# Altium PCB PCB1.PcbDoc
Units mil, origin at the board's own origin, x right, y up, seen from the top; angles counter-clockwise.
Board outline 4590 x 4355 mil, 2 copper layers (Top Layer, Bottom Layer); 103 components, 89 nets, 465 pads, 47 vias.
Unrouted connection lines stored in the file: 37.
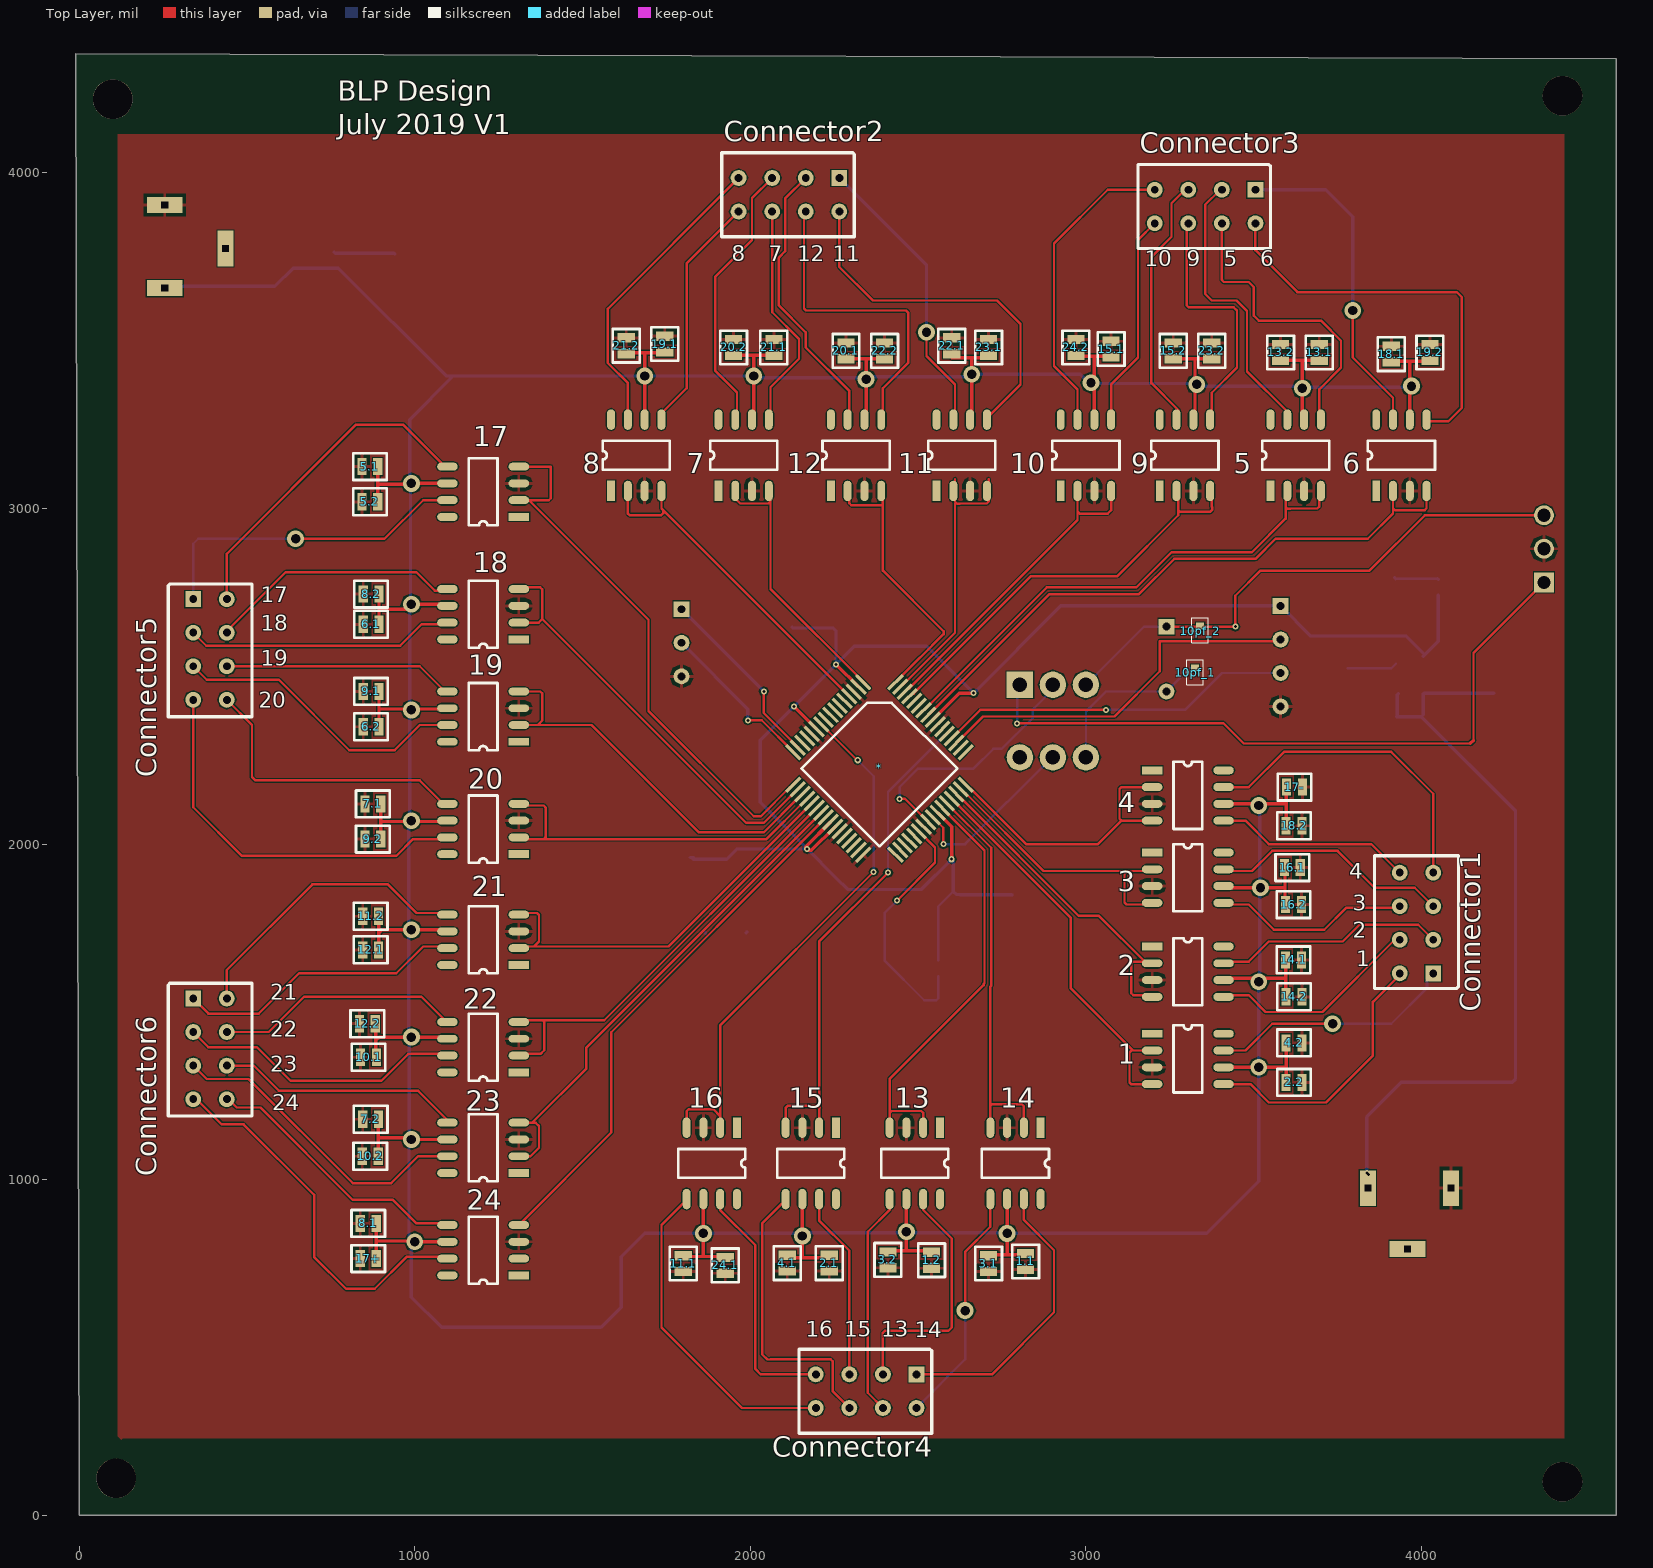
[diagram p0: Top Layer view]
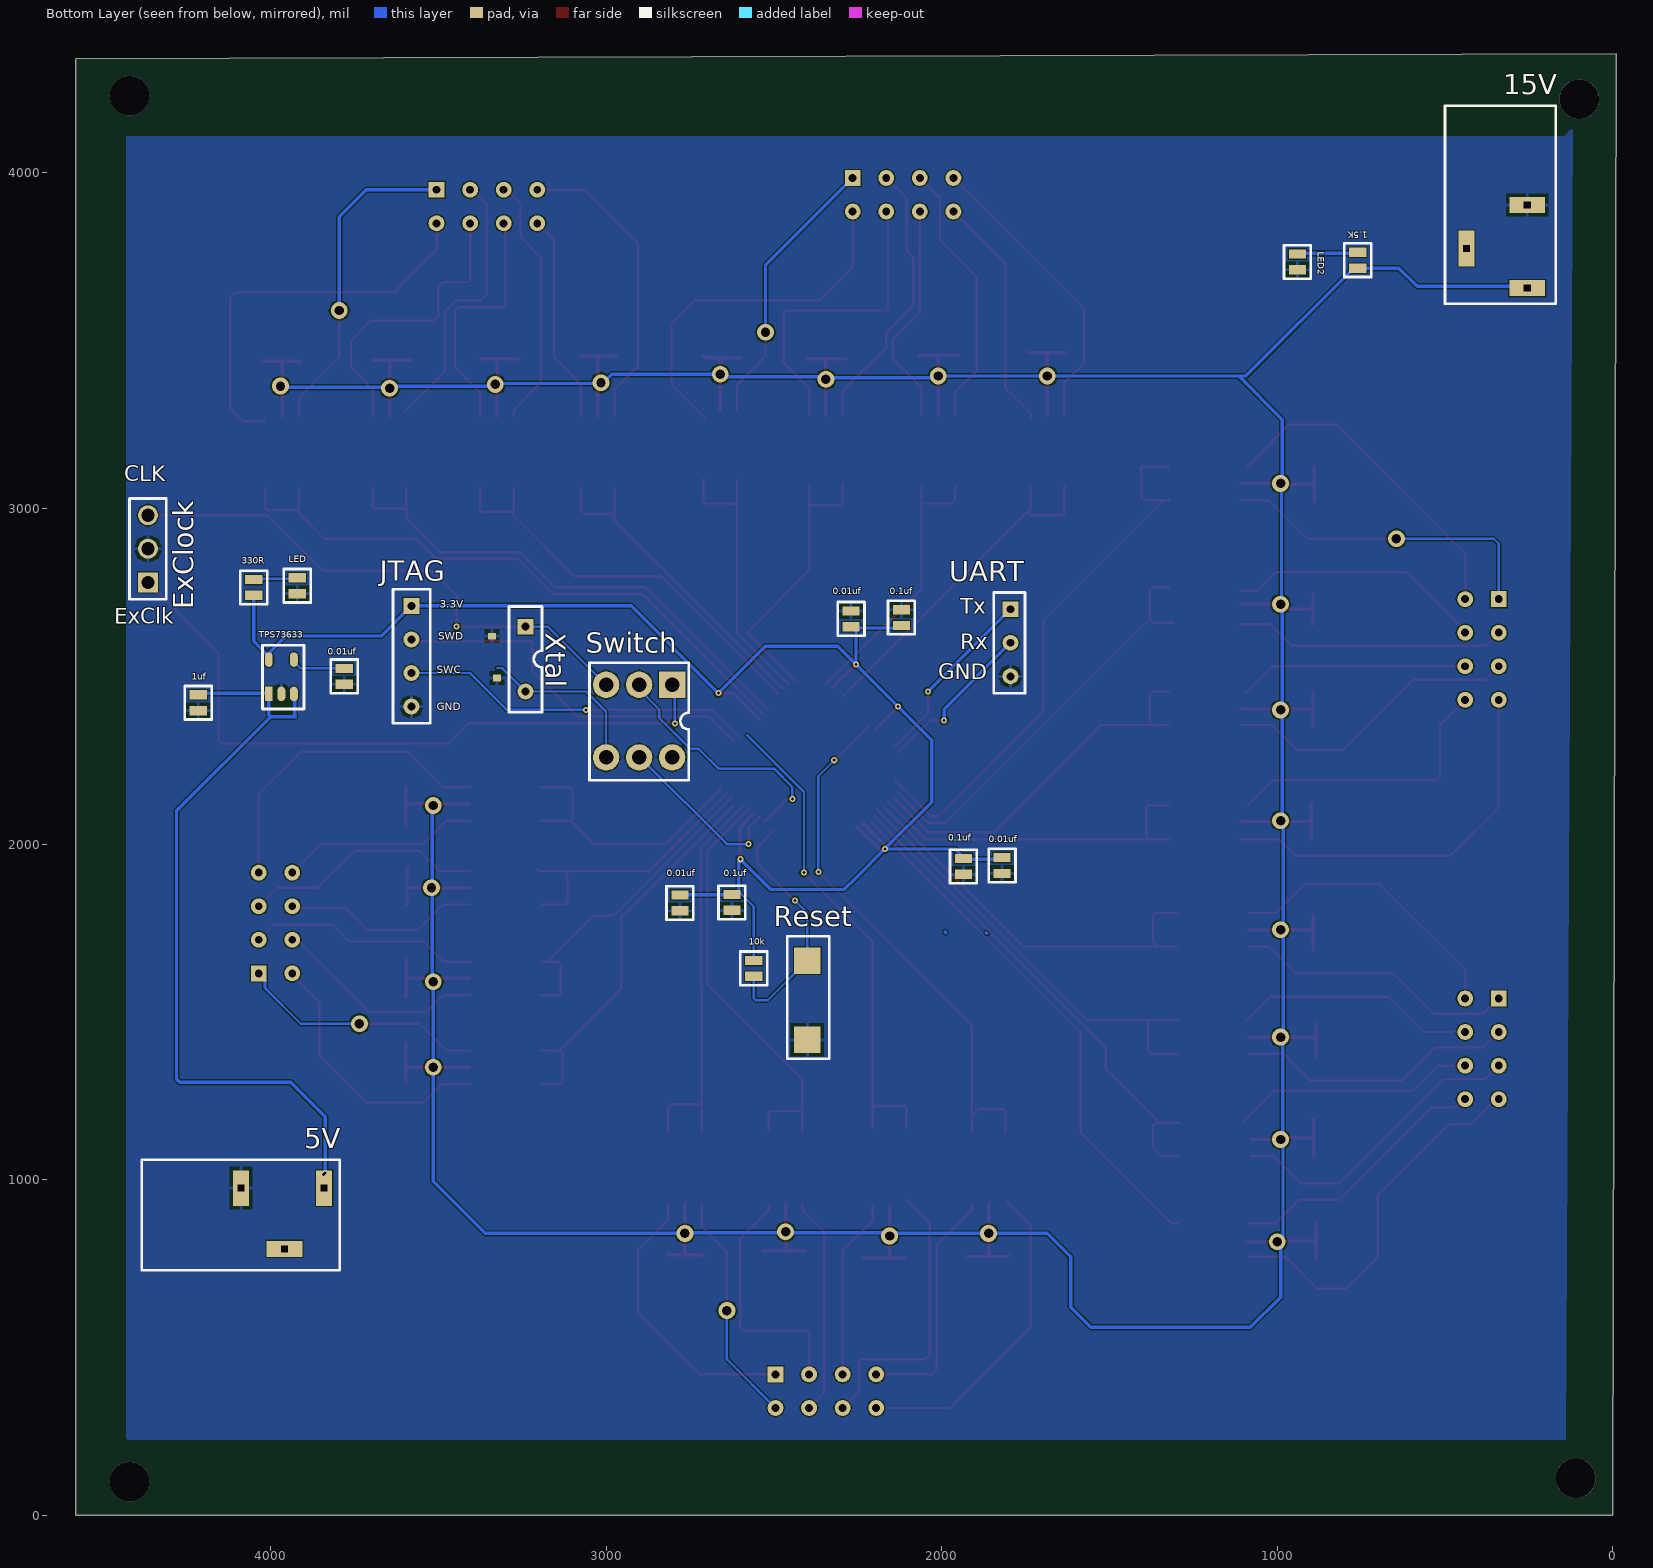
[diagram p1: Bottom Layer view, seen from below]

## Layer stack, top to bottom
Top Solder: solder mask 0.4, Solder Resist, Dk 3.5
Top Layer: signal copper 1.4
Dielectric 1: dielectric 12.6, FR-4, Dk 4.8
Bottom Layer: signal copper 1.4
Bottom Solder: solder mask 0.4, Solder Resist, Dk 3.5

## Board outline
-10,4355 0,50 0,0 30,0 4580,0 4580,30 4580,4340

## Design rules (kind name [scope] priority, off if disabled: settings)
Clearance [All] p1: gap=2 ignorepadtopadclearanceinfootprint=FALSE except(0: Arc-Hole Track-Hole SMDPad-Hole THPad-Hole Via-Hole Fill-Hole Poly-Hole Region-Hole Text-Hole; 3: Arc-Poly Track-Poly SMDPad-Poly THPad-Poly Fill-Poly Poly-Poly; 5: Via-Poly)
ComponentClearance [All] p1 off: gap=10 collisioncheckmode=3 verticalgap=10 showdistances=FALSE
PolygonConnect [All] p1: connectstyle=Relief reliefconductorwidth=10 reliefentries=4 polygonreliefangle="90 Angle" airgapwidth=10
RoutingVias [All] p1: holewidth=28 width=50 viastyle="Through Hole" minholewidth=28 minwidth=50 maxholewidth=28 maxwidth=50
ShortCircuit [All] p1 off: allowed=FALSE
SolderMaskExpansion [All] p1: expansion=4
Width [All] p1 off: maxlimit=10 minlimit=5 preferedwidth=10 bottomlayer_minwidth=10 minimp=50.000000 maximp=50.000000 favimp=50.000000
28 further rules are at their usual default settings.

## Components (designator, comment, footprint, x,y, rotation, side; value= is the part's Value field where it differs from the comment)
0.01uf "Capacitor" 0805 3780,2500 r270 bottom
0.1uf "Capacitor" 0805 1935,1933.62 r270 bottom (schematic designator 0.1uf_3)
0.01uf "Capacitor" 0805 1820,1936.38 r270 bottom (schematic designator 0.01uf_3)
0.1uf "Capacitor" 0805 2120,2675 r90 bottom (schematic designator 0.1uf_2)
0.01uf "Capacitor" 0805 2270,2671.38 r90 bottom (schematic designator 0.01uf_2)
0.1uf "Capacitor" 0805 2625,1826.38 r270 bottom (schematic designator 0.1uf_1)
0.01uf "Capacitor" 0805 2780,1825 r270 bottom (schematic designator 0.01uf_1)
1 "TC4428" TC4428SOC 3197.4,1435 r0 top
1.1 "Capacitor" 0805 2820,756.38 r270 top
1.2 "Capacitor" 0805 2540,760 r270 top
1.5K "Resistor" 0805 760,3740 r270 bottom
1uf "Capacitor" 0805 4215,2421.38 r90 bottom
2 "TC4428" TC4428SOC 3197.4,1695 r0 top
2.1 "Capacitor" 0805 2235,751.38 r270 top
2.2 "Capacitor" 0805 3620,1290 r0 top
3 "TC4428" TC4428SOC 3197.4,1975 r0 top
3.1 "Capacitor" 0805 2710,750 r270 top
3.2 "Capacitor" 0805 2410,761.38 r270 top
4 "TC4428" TC4428SOC 3197.4,2220 r0 top
4.1 "Capacitor" 0805 2110,751.38 r270 top
4.2 "Capacitor" 0805 3620,1407.76 r0 top
5 "TC4428" TC4428SOC 3550,3052.4 r90 top
5.1 "Capacitor" 0805 866.38,3125 r180 top
5.2 "Capacitor" 0805 866.38,3020 r180 top
5V "3.3VPower" DIP10 4383.31,975 r180 bottom
6 "TC4428" TC4428SOC 3865,3052.4 r90 top
6.1 "Capacitor" 0805 870,2655 r180 top
6.2 "Capacitor" 0805 870,2350 r180 top
7 "TC4428" TC4428SOC 1905,3052.4 r90 top
7.1 "Capacitor" 0805 875,2120 r180 top
7.2 "Capacitor" 0805 868.62,1180 r180 top
8 "TC4428" TC4428SOC 1585,3052.4 r90 top
8.1 "Capacitor" 0805 861.38,870 r180 top
8.2 "Capacitor" 0805 870,2745 r180 top
9 "TC4428" TC4428SOC 3220,3052.4 r90 top
9.1 "Capacitor" 0805 870,2455 r180 top
9.2 "Capacitor" 0805 875,2015 r180 top
10 "TC4428" TC4428SOC 2925,3052.4 r90 top
10.1 "Capacitor" 0805 862.24,1365 r180 top
10.2 "Capacitor" 0805 867.24,1070 r180 top
10k "Resistor" 0805 2560,1630 r90 bottom
10pf_1 "10pf" 10pf 3325,2510 r270 top
10pf_2 "10pf" 10pf 3340,2635 r270 top
11 "TC4428" TC4428SOC 2555,3052.4 r90 top
11.1 "Capacitor" 0805 1800,750 r270 top
11.2 "Capacitor" 0805 868.62,1785 r180 top
12 "TC4428" TC4428SOC 2240,3052.4 r90 top
12.1 "Capacitor" 0805 868.62,1685 r180 top
12.2 "Capacitor" 0805 858.62,1465 r180 top
13 "TC4428" TC4428SOC 2565,1155 r270 top
13.1 "Capacitor" 0805 3695,3465 r90 top
13.2 "Capacitor" 0805 3580,3465 r90 top
14 "TC4428" TC4428SOC 2865,1155 r270 top
14.1 "Capacitor" 0805 3618.62,1655 r0 top
14.2 "Capacitor" 0805 3620,1545 r0 top
15 "TC4428" TC4428SOC 2255,1155 r270 top
15.1 "Capacitor" 0805 3075,3475 r90 top
15.2 "Capacitor" 0805 3260,3470 r90 top
15V "12VPower" DIP10 255,4200 r270 bottom
16 "TC4428" TC4428SOC 1960,1155 r270 top
16.1 "Capacitor" 0805 3615,1930 r0 top
16.2 "Capacitor" 0805 3618.62,1820 r0 top
17 "TC4428" TC4428SOC 1310,2975 r180 top
17+ "Capacitor" 0805 861.38,765 r180 top
17- "Capacitor" 0805 3621.38,2170 r0 top
18 "TC4428" TC4428SOC 1310,2610 r180 top
18.1 "Capacitor" 0805 3910,3460 r90 top
18.2 "Capacitor" 0805 3620,2055 r0 top
19 "TC4428" TC4428SOC 1310,2305 r180 top
19.1 "Capacitor" 0805 1745,3490 r90 top
19.2 "Capacitor" 0805 4025,3465 r90 top
20 "TC4428" TC4428SOC 1310,1970 r180 top
20.1 "Capacitor" 0805 2285,3470 r90 top
20.2 "Capacitor" 0805 1950,3480 r90 top
21 "TC4428" TC4428SOC 1310,1640 r180 top
21.1 "Capacitor" 0805 2070,3480 r90 top
21.2 "Capacitor" 0805 1630,3485 r90 top
22 "TC4428" TC4428SOC 1310,1320 r180 top
22.1 "Capacitor" 0805 2600,3485 r90 top
22.2 "Capacitor" 0805 2400,3470 r90 top
23 "TC4428" TC4428SOC 1310,1020 r180 top
23.1 "Capacitor" 0805 2710,3480 r90 top
23.2 "Capacitor" 0805 3375,3470 r90 top
24 "TC4428" TC4428SOC 1310,715 r180 top
24.1 "Capacitor" 0805 1925,745 r270 top
24.2 "Capacitor" 0805 2970,3480 r90 top
330R "Resistor" 0805 4050,2765 r90 bottom
* "TM4C123GH6PM" "Quad64 - duplicate" 2336.24,2482.44 r315 top
Connector1 "Connector" Connector 4035,1615 r180 top
Connector2 "Connector" Connector 2265,3985 r270 top
Connector3 "Connector" Connector 3505,3950 r270 top
Connector4 "Connector" Connector 2495,420 r270 top
Connector5 "Connector" Connector 340,2730 r0 top
Connector6 "Connector" Connector 340,1540 r0 top
ExClock "3pin" 3pin 4365,2780 r0 bottom
JTAG "JTAG" "JTAG - duplicate" 3580,2710 r180 bottom
LED "LED" 0805 3920,2770 r270 bottom
LED2 "LED" 0805 940,3735 r270 bottom
Reset "Reset" Reset 2400,1535 r270 bottom
Switch "LockBottom" Lock 2803.15,2475 r270 bottom
TPS73633 "TPS73633" 3.3v 4005,2447.64 r90 bottom
UART "UART" UART 1795,2700 r180 bottom
Xtal "Xtal" Crystal 3240,2647.91 r270 bottom

## Footprints (in the part's own frame and the unit in brackets; to place one, negate y for a bottom-side part, rotate by r counter-clockwise, add the part's x,y. Pads: shape width x height; smd on the part's side, far side on the other; paste and mask are expansions set on the pad)
3.3v [mm]
  rect 1.1x0.6 smd: 1(0,0)
  oval 1.1x0.6 smd: 2(0,-0.95) 3(0,-1.9) 4(2.6,-1.9) 6(2.6,0)
  silkscreen extent -1.14,-2.67 3.68,0.48
3pin [mm]
  rect 1.5x1.5 hole 1: 1(0,0)
  round 1.5 hole 1: 2(0,-2.54) 3(0,-5.08)
  silkscreen extent -1.4,-6.35 1.4,1.27
10pf [mm]
  rect 0.5x0.6 smd: 1(-0.381,0)
  rect 0.5x0.6 smd far side: 2(0.381,0)
  silkscreen extent -1.02,-0.64 0.89,0.62
0805 [mm]
  rect 0.7x1.3 smd: 1(-0.6,0) 2(0.6,0)
  silkscreen extent -1.27,-1.02 1.27,1.02
Connector [mm]
  rect 1.2x1.2 hole 0.6: 1(0,0)
  round 1.2 hole 0.6: 2(0,-2.54) 3(0,-5.08) 4(0,-7.62) 5(2.54,-7.62) 6(2.54,-5.08) 7(2.54,-2.54) 8(2.54,0)
  silkscreen extent -1.91,-8.89 4.45,1.14
Crystal [mm]
  rect 1.2x1.2 hole 0.6: 1(0,0)
  round 1.2 hole 0.6: 2(4.9,0)
  silkscreen extent -1.52,-1.25 6.48,1.25
DIP10 [mm]
  rect 1.2x2.7 hole 0.5 square: 1(7.5,0) 2(13.8,0)
  rect 2.7x1.2 hole 0.5 square: 3(10.8,-4.6)
  silkscreen extent 0,-6.22 14.99,2.16
"JTAG - duplicate" [mm]
  rect 1.2x1.2 hole 0.6: 3.3V(0,0)
  round 1.2 hole 0.6: GND(0,-7.62) SWC(0,-5.08) SWD(0,-2.54)
  silkscreen extent -1.4,-8.89 1.43,1.27
Lock [mm]
  rect 2x2 hole 1.1: 1(0,0)
  round 2 hole 1.1: 2(0,-2.5) 3(0,-5) 4(5.5,-5) 5(5.5,-2.5) 6(5.5,0)
  silkscreen extent -1.65,-6.25 7.24,1.25
"Quad64 - duplicate" [mm]
  oval 1.55x0.25 smd: 1(0,0)
  rect 1.55x0.25 smd: 2(0,-0.5) 3(0,-1) 4(0,-1.5) 5(0,-2) 6(0,-2.5) 7(0,-3) 8(0,-3.5) 9(0,-4) 10(0,-4.5) 11(0,-5) 12(0,-5.5) 13(0,-6) 14(0,-6.5) 15(0,-7) 16(0,-7.5) 33(10.96,-7.5) 34(10.96,-7) 35(10.96,-6.5) 36(10.96,-6) 37(10.96,-5.5) 38(10.96,-5) 39(10.96,-4.5) 40(10.96,-4) 41(10.96,-3.5) 42(10.96,-3) 43(10.96,-2.5) 44(10.96,-2) 45(10.96,-1.5) 46(10.96,-1) 47(10.96,-0.5) 48(10.96,0)
  rect 0.25x1.55 smd: 17(1.73,-9.23) 18(2.23,-9.23) 19(2.73,-9.23) 20(3.23,-9.23) 21(3.73,-9.23) 22(4.23,-9.23) 23(4.73,-9.23) 24(5.23,-9.23) 25(5.73,-9.23) 26(6.23,-9.23) 27(6.73,-9.23) 28(7.23,-9.23) 29(7.73,-9.23) 30(8.23,-9.23) 31(8.73,-9.23) 32(9.23,-9.23) 49(9.23,1.73) 50(8.73,1.73) 51(8.23,1.73) 52(7.73,1.73) 53(7.23,1.73) 54(6.73,1.73) 55(6.23,1.73) 56(5.73,1.73) 57(5.23,1.73) 58(4.73,1.73) 59(4.23,1.73) 60(3.73,1.73) 61(3.23,1.73) 62(2.73,1.73) 63(2.23,1.73) 64(1.73,1.73)
  silkscreen extent 1.31,-7.92 9.65,0.42
Reset [mm]
  rect 2x2 smd: 1(-3,0) 2(3,0)
  silkscreen extent -4.83,-1.52 4.44,1.65
TC4428SOC [mm]
  rect 1.55x0.6 smd: 1(0,0)
  oval 1.55x0.6 smd: 2(0,-1.27) 3(0,-2.54) 4(0,-3.81) 5(5.4,-3.81) 6(5.4,-2.54) 7(5.4,-1.27) 8(5.4,0)
  silkscreen extent 1.61,-4.44 3.79,0.64
UART [mm]
  round 1.2 hole 0.6: GND(0,-5.08) Tx(0,-2.54)
  rect 1.2x1.2 hole 0.6: Rx(0,0)
  silkscreen extent -1.27,-6.35 1.11,1.27

## Part data
1 2 3 4 5 6 7 8 9 10 11 12 13 14 15 16 17 18 19 20 21 22 23 24: "Dual High-Speed Power MOSFET Drivers"
*: "IC MCU 32BIT 256KB FLASH 64LQFP"

## Free pads (board coordinates)
  round 118.11 hole 118.11 unplated: 1(110,110) 2(4420,100) 3(4420,4230) 4(100,4220)

## Via types
v1: diameter 50, hole 28, Top Layer to Bottom Layer, 29 vias
v2: diameter 18, hole 9, Top Layer to Bottom Layer, 18 vias

## Nets (pads, with @x,y where several pads share a name; then routed paths per layer and width w, separated by ;. In a path a pad name is that pad's centre, name@x,y a point inside that pad or via, vN(x,y) a via of type N, cw(c..) or ccw(c..) an arc to the next point about the centre after c; other vN are vias at no path point)
1: 1.2 1.4 *.45 | length 1167.2
  Top Layer w7: *.45@2620.14,2115.14 2955,1780.27 2955,1570 3140,1385 ; 1.4@3193.7,1285 3145,1285 3144.14,1284.14 3135.86,1284.14 3130,1290 3130,1379.14 3135.86,1385 3140,1385 ; 1.2@3193.7,1385 3140,1385
1+: 1.7 Connector1.1 | length 765
  Top Layer w7: 1.7@3406.3,1385 3475,1385 3555,1465 v1(3735,1465) ; Connector1.1@4016.38,1596.38 Connector1.1
  Bottom Layer w7: v1(3735,1465) 3910,1465 4016.38,1571.38
  Bottom Layer w10: 4016.38,1571.38 4016.38,1596.38 Connector1.1
1-: 1.5 Connector1.8 | length 807.6
  Top Layer w7: 1.5@3406.3,1285 3490,1285 3545,1230 3715,1230 3855,1370 3855,1530 3935,1610 Connector1.8
2: 2.2 2.4 *.46 | length 963.5
  Top Layer w7: *.46@2625,2140 2978.7,1786.3 3038.7,1786.3 2.2@3175,1650 ; 2.4@3193.7,1550 3140.86,1550 3135,1555.86 3135,1644.14 3140.86,1650 2.2@3175,1650 ; 2.2@3193.7,1650 2.2@3175,1650
2+: 2.7 Connector1.2 | length 692.9
  Top Layer w7: 2.7@3406.3,1650 3485,1650 3545,1710 3765,1710 3815,1760 3990,1760 Connector1.2
2-: 2.5 Connector1.7 | length 638.5
  Top Layer w7: 2.5@3406.3,1550 3485,1550 3535,1500 3705,1500 3920,1715 Connector1.7
3: 3.2 3.4 *.47 | length 840.8
  Top Layer w7: *.47@2641.64,2151.64 2873.28,1920 3125,1920 ; 3.4@3193.7,1820 3120.86,1820 3115,1825.86 3115,1910 3125,1920 ; 3.2@3205,1925 3200,1920 3193.7,1920 3125,1920
3+: 3.7 Connector1.3 | length 721.9
  Top Layer w7: 3.7@3406.3,1920 3495,1920 3555,1980 3750,1980 3860,1870 3980,1870 Connector1.3
3-: 3.5 Connector1.6 | length 588.8
  Top Layer w7: 3.5@3406.3,1820 3485,1820 3560,1745 3710,1745 3775,1810 3930,1810 Connector1.6
3.3V: 0.1uf.1 0.01uf.1@1820,1960 0.01uf.1@2270,2647.76 0.01uf.1@2780,1848.62 10k.2 330R.1 *.2 *.11 *.25 *.26 *.42 *.56 JTAG.3.3V TPS73633.6 | length 5249.5
  Top Layer w10: v2(2130,2410) 2130.29,2410 *.11 ; *.25 2165,1992.16 2165,1990 v2(2169.35,1985.65) 2173.7,1981.3 2181.98,1981.3 *.26 ; v2(2255,2535) 2255.84,2535 *.2 ; *.56 2622.84,2450 v2(2665,2450) ; *.42 2600,2051.64 v2(2600,1955)
  Bottom Layer w7: 10k.2 2560,1814.37 0.1uf.1@2604.41,1858.78
  Bottom Layer w10: 0.01uf.1@1820,1960 0.01uf.1@1831.81,1960 ; 0.01uf.1@1830,1955 1930,1955 1960.65,1985.65 v2(2169.35,1985.65) ; 0.1uf.1@2125,2646.38 2127.5,2643.88 2247.5,2643.88 2255,2636.38 v2(2255,2535) ; 0.01uf.1@2780,1848.62 2779.31,1849.31 2625.69,1849.31 2625,1850 2613.19,1850 2604.41,1858.78 2604.41,1948.43 2600,1952.84 v2(2600,1955) 2510,1865 2290,1865 2255,1900 v2(2169.35,1985.65) ; TPS73633.6@4005,2559.84 TPS73633.6@4010.08,2564.92 ; 330R.1 4050,2604.84 TPS73633.6@4010.08,2564.92 ; v2(2169.35,1985.65) 2030,2125 2030,2310 v2(2130,2410) v2(2255,2535) ; v2(2255,2535) 2310,2590 2525,2590 v2(2665,2450) 2925,2710 JTAG.3.3V 3670,2620 3955,2620 TPS73633.6@4010.08,2564.92
4: 4.2 4.4 *.48 | length 828.3
  Top Layer w7: *.48@2655.78,2165.78 2821.57,2000 3035.86,2000 3105.86,2070 ; 4.4@3193.7,2070 3105.86,2070 ; 4.2@3193.7,2170 3105.86,2170 3100,2164.14 3100,2075.86 3105.86,2070
4+: 4.7 Connector1.4 | length 959
  Top Layer w7: 4.7@3406.3,2170 3485,2170 3590,2275 3910,2275 4035,2150 Connector1.4
4-: 4.5 Connector1.5 | length 592.9
  Top Layer w7: 4.5@3406.3,2070 3475,2070 3545,2000 3850,2000 Connector1.5
5: 5.2 5.4 *.58 | length 1564.5
  Top Layer w7: *.58@2520.02,2401.78 2883.24,2765 3150,2765 3255,2870 3495,2870 3595,2970 3595,3005 ; 5.2@3595,3062.4 3595,3005 ; 5.4@3695,3062.4 3695,3005.86 3689.14,3000 3610,3000 3609.14,2999.14 3600.86,2999.14 3595,3005
5+: 5.7 Connector3.2 | length 832
  Top Layer w7: Connector3.2 3400,3950 3355,3905 3355,3640 3375,3620 3448.28,3620 3480,3588.28 3480,3408.7 5.7@3601.85,3286.85
5-: 5.5 Connector3.7 | length 900.8
  Top Layer w7: Connector3.7 3405,3680.86 3410.86,3675 3485,3675 3500,3660 3500,3575 3515,3560 3700,3560 3760,3500 3760,3420 3695,3355 5.5@3695,3275
5V: 1uf.2 5V.2 TPS73633.1 TPS73633.3 | length 2283.3
  Bottom Layer w10: v2(3841.97,1015) v2(3836.97,1020) 3836.97,1186.97 3940,1290 4270,1290 4280,1300 4280,2099.14 3999.14,2380 ; 3925.86,2380 3927.59,2380 ; TPS73633.3 3927.59,2445.03 3927.59,2380 ; 1uf.2@4215,2450 4007.36,2450 TPS73633.1 4005,2385.86 3999.14,2380 ; 3927.59,2380 3999.14,2380
6: 6.2 6.4 *.57 | length 1872.1
  Top Layer w7: *.57@2534.16,2387.63 2891.53,2745 3158.28,2745 3263.28,2850 3505,2850 3565,2910 3840,2910 3915,2985 3915,3000.86 ; 6.2@3915,3062.4 3915,3000.86 ; 6.4@4015,3062.4 4015,3000.86 4009.14,2995 3920.86,2995 3915,3000.86
6+: 6.7 Connector3.1 | length 967.8
  Top Layer w7: v1(3795,3590) 3795,3450 3915,3330 6.7@3915,3275
  Bottom Layer w10: Connector3.1 3715,3950 3795,3870 v1(3795,3590)
6-: 6.5 Connector3.8 | length 1204.6
  Top Layer w7: Connector3.8 3505,3770 3630,3645 4105,3645 4120,3630 4120,3300 4080,3260 6.5@4015,3260
7: 7.2 7.4 *.1 | length 859.3
  Top Layer w7: 7.2@1960,3067.4 1960,3025 1970,3015 2054.14,3015 2060,3020.86 ; 7.4@2060,3067.4 2060,3020.86 ; *.1@2345.26,2475.26 2060,2760.52 2060,3020.86
7+: 7.7 Connector2.3 | length 802.3
  Top Layer w7: 7.7@1960,3280 1960,3346.19 1895,3411.19 1895,3690 2005,3800 2005,3925 Connector2.3
7-: 7.5 Connector2.6 | length 673.3
  Top Layer w7: 7.5@2060,3280 2060,3361.19 2145,3446.19 2145,3505 2065,3585 Connector2.6
8: 8.2 8.4 *.4 | length 1041.1
  Top Layer w7: 8.2@1635,3067.4 1635,2985 1640,2980 1734.14,2980 1740,2985.86 1740,2995.27 ; 8.4@1735,3067.4 1735,3000.27 1740,2995.27 ; *.4@2280.14,2455.14 1740,2995.27 ; *.4@2291.74,2443.53 *.4@2291.74,2445.26
8+: 8.7 Connector2.4 | length 891.4
  Top Layer w7: 8.7@1635,3280 1635,3373.69 1575,3433.69 1575,3595 Connector2.4
8-: 8.5 Connector2.5 | length 715.3
  Top Layer w7: 8.5 1735,3283.7 1810,3358.7 1810,3730 Connector2.5
9: 9.2 9.4 *.61 | length 1263.7
  Top Layer w7: *.61@2486.42,2448.58 2836.42,2798.58 3093.58,2798.58 3275,2980 3275,2995.86 ; 9.2@3275,3062.4 3275,2995.86 ; 9.4@3375,3062.4 3375,3005 3375.86,3004.14 3375.86,2995.86 3370,2990 3280.86,2990 3275,2995.86
9+: 9.7 Connector3.3 | length 759.6
  Top Layer w7: 9.7@3275,3275 3275,3293.7 3195,3373.7 3195,3750 3255,3810 3255,3910 3295,3950 Connector3.3
9-: 9.5 Connector3.6 | length 748.8
  Top Layer w7: Connector3.6 3300,3845 3300,3605.86 3305.86,3600 3440,3600 3450,3590 3450,3420 3375,3345 9.5@3375,3275
10: 10.2 10.4 *.62 | length 983.2
  Top Layer w7: *.62@2470,2465 2474.55,2465 2975,2965.45 2975,2990.86 ; 10.2@2975,3062.4 2975,2990.86 ; 10.4@3075,3062.4 3075,2995 3065,2985 2980.86,2985 2975,2990.86
10+: 10.7 Connector3.4 | length 910.3
  Top Layer w7: 10.7@2975,3275 2975,3355 2905,3425 2905,3790 3065,3950 Connector3.4
10-: 10.5 Connector3.5 | length 628.8
  Top Layer w7: 10.5@3075,3275 3075,3370 3155,3450 3155,3800 Connector3.5
11: 11.2 11.4 *.63 | length 843.4
  Top Layer w7: *.63@2455,2475 2610,2630 2610,3015 ; 2610,3087.4 2610,3020 2615.86,3014.14 2624.14,3014.14 2625,3015 2704.14,3015 2710,3020.86 2710,3087.4
11+: 11.7 Connector2.1 | length 837.9
  Top Layer w7: v1(2525,3525) 2525,3455 2610,3370 11.7@2610,3290
  Bottom Layer w10: Connector2.1 2525,3725 v1(2525,3525)
11-: 11.5 Connector2.8 | length 1096.8
  Top Layer w7: Connector2.8 2265,3720 2365,3620 2735,3620 2805,3550 2805,3370 11.5@2705,3270
12: 12.2 12.4 *.64 | length 868.9
  Top Layer w7: 12.2@2295,3067.4 2295,3015.86 2300.86,3010 2394.14,3010 2395,3010.86 ; 12.4@2395,3067.4 2395,3010.86 ; *.64@2435.64,2486.16 2505.49,2556.01 2506.01,2556.01 2575.86,2625.86 2575.86,2634.14 2395,2815 2395,3010.86
12+: 12.7 Connector2.2 | length 825.1
  Top Layer w7: Connector2.2 2103.62,3923.62 2103.62,3766.72 2085,3748.09 2085,3605 2165,3525 2165,3480 2295,3350 12.7@2295,3280
12-: 12.5 Connector2.7 | length 941.3
  Top Layer w7: Connector2.7 2160,3880 2160,3595.86 2165.86,3590 2464.14,3590 2470,3584.14 2470,3433.69 2395,3358.69 12.5@2395,3280
13: 13.2 13.4 *.43 | length 1292.7
  Top Layer w7: 13.4@2415,1141.3 2415,1199.14 ; 13.2@2515,1141.3 2515,1199.14 2509.14,1205 2420.86,1205 2415,1199.14 ; *.43@2575.25,2103.46 2697.71,1981 2697.71,1586.12 2695,1583.41 2695,1580 2415,1300 2415,1199.14
13+: 13.7 Connector4.2 | length 739.6
  Top Layer w7: Connector4.2 2395,544.14 2400.86,550 2590,550 2600,560 2600,825 2515,910 13.7@2515,928.7
13-: 13.5 Connector4.7 | length 654.3
  Top Layer w7: Connector4.7 2350,365 2350,845 2415,910 13.5@2415,928.7
14: 14.2 14.4 *.44 | length 1213.3
  Top Layer w7: *.44@2589.39,2117.6 2717.71,1989.28 2717.71,1577.84 2715,1575.13 2715,1219.14 ; 14.4@2715,1141.3 2715,1219.14 ; 14.2@2815,1141.3 2815,1219.14 2809.14,1225 2720.86,1225 2715,1219.14
14+: 14.7 Connector4.1 | length 847.6
  Top Layer w7: Connector4.1 2720,420 2905,605 2905,790 2815,880 14.7@2815,928.7
14-: 14.5 Connector4.8 | length 699.8
  Top Layer w7: v1(2640,610) 2640,785 2715,860 14.5@2715,928.7
  Bottom Layer w7: Connector4.8 2640,465 v1(2640,610)
15: 15.2 15.4 *.53 | length 1489.3
  Top Layer w7: 15.4 2105,1214.14 2110.86,1220 2199.14,1220 ; 15.2 2205,1214.14 2205,1710 v2(2410,1915)
  Top Layer w10: 2199.14,1220 2205,1214.14
  Bottom Layer w7: v2(2410,1915) 2410,2155 2580,2325
15+: 15.7 Connector4.3 | length 546
  Top Layer w7: 15.7@2205,928.7 2205,878.16 2295,788.16 Connector4.3
15-: 15.5 Connector4.6 | length 868.2
  Top Layer w7: 15.5@2105,940 2035,870 2035,480 2050.86,464.14 2059.14,464.14 2060,465 2239.14,465 2245,459.14 2245,370 Connector4.6
16: 16.2 16.4 *.10 | length 1640.4
  Top Layer w7: 16.4@1810,1141.3 16.4 1810,1204.14 1815.86,1210 1890,1210 1910,1190 ; 16.2@1910,1141.3 16.2 1910,1190 ; *.10@2214.12,2354.12 2318.24,2250 v2(2320,2250) ; v2(2367.5,1917.5) 1910,1460 1910,1190
  Bottom Layer w7: v2(2320,2250) 2367.5,2202.5 v2(2367.5,1917.5)
16+: 16.7 Connector4.4 | length 722.9
  Top Layer w7: 16.7@1910,928.7 1910,910 2015,805 2015,435.86 2030.86,420 Connector4.4
16-: 16.5 Connector4.5 | length 963.4
  Top Layer w7: 16.5@1805,935 1735,865 1735,560 1975,320 Connector4.5
17: 17.2 17.4 *.17 | length 1648.4
  Top Layer w7: 17.2@1321.3,3025 17.2@1340,3025 ; 17.4@1321.3,3125 1404.14,3125 1405,3124.14 1405,3030.86 1399.14,3025 17.2@1340,3025 ; *.17@2118.84,2169.36 2117.45,2169.36 2031.38,2083.28 2010,2083.28 1696.64,2396.64 1696.64,2668.36 17.2@1340,3025 ; *.17@2123.84,2174.36 *.17@2138.84,2189.36
17+: 17.7 Connector5.1 | length 977.5
  Top Layer w7: v1@655,2910 910,2910 1025,3025 17.7@1108.7,3025
  Bottom Layer w7: Connector5.1 340,2895 355,2910 v1(645,2910)
17-: 17.5 Connector5.8 | length 996.2
  Top Layer w7: Connector5.8 440,2865 825,3250 965,3250 17.5@1090,3125
18: 18.2 18.4 *.18 | length 1260.4
  Top Layer w7: 18.2 1369.18,2660 1380,2670.82 ; 18.4@1321.3,2765 1374.14,2765 1380,2759.14 1380,2670.82 ; *.18@2128.19,2151.81 2039.66,2063.28 1987.53,2063.28 1380,2670.82
18+: 18.7 Connector5.2 | length 811.1
  Top Layer w7: Connector5.2 378.62,2591.38 956.38,2591.38 1020,2655 18.7@1108.7,2655
18-: 18.5 Connector5.7 | length 769
  Top Layer w7: Connector5.7 440,2635 615,2810 1005,2810 1060,2755 18.5@1108.7,2755
19: 19.2 19.4 *.19 | length 1160.4
  Top Layer w7: 19.2@1321.3,2355 1366.81,2355 ; 19.4@1321.3,2455 1374.14,2455 1380,2449.14 1380,2368.19 1366.81,2355 ; *.19@2144.83,2140.17 2039.66,2035 1846.84,2035 1526.84,2355 1366.81,2355
19+: 19.7 Connector5.3 | length 903.3
  Top Layer w7: Connector5.3 380,2490 595,2490 805,2280 940,2280 1015,2355 19.7@1108.7,2355
19-: 19.5 Connector5.6 | length 684.6
  Top Layer w7: Connector5.6 1015,2530 19.5@1092.5,2452.5
20: 20.2 20.4 *.20 | length 1051.4
  Top Layer w7: 20.2@1321.3,2015 1384.14,2015 ; 20.4@1321.3,2115 1384.14,2115 1390,2109.14 1390,2020.86 1384.14,2015 ; *.20@2158.97,2126.03 2047.94,2015 1384.14,2015
20+: 20.7 Connector5.4 | length 1169.5
  Top Layer w7: Connector5.4 340,2110 485,1965 945,1965 995,2015 20.7@1108.7,2015
20-: 20.5 Connector5.5 | length 864.2
  Top Layer w7: Connector5.5 515,2355 515,2200 525,2190 1015,2190 20.5@1085,2120
21: 21.2 21.4 *.21 | length 1222.4
  Top Layer w7: 21.2@1296.3,1695 1355,1695 ; 21.4@1296.3,1795 1364.14,1795 1370,1789.14 1370,1710 1355,1695 ; *.21@2170.61,2109.39 1756.23,1695 1355,1695
21+: 21.7 Connector6.1 | length 859.3
  Top Layer w7: Connector6.1@330,1530 Connector6.1 385,1495 535,1495 655,1615 945,1615 1025,1695 21.7@1083.7,1695
21-: 21.5 Connector6.8 | length 869.5
  Top Layer w7: Connector6.8 440,1625 695,1880 920,1880 1005,1795 21.5@1083.7,1795
22: 22.2 22.4 *.22 | length 1343.9
  Top Layer w7: 22.2@1296.3,1375 1375,1375 1385.86,1385.86 1385.86,1469.14 1380,1475 ; 22.4@1296.3,1475 1380,1475 ; *.22@2193.86,2104.35 1564.51,1475 1380,1475
22+: 22.7 Connector6.2 | length 836.9
  Top Layer w7: Connector6.2 385,1395 530,1395 630,1295 900.66,1295 980.66,1375 22.7@1083.7,1375
22-: 22.5 Connector6.7 | length 722.5
  Top Layer w7: Connector6.7 565,1440 670,1545 1020,1545 22.5@1090,1475
23: 23.2 23.4 *.23 | length 1499.6
  Top Layer w7: 23.2@1291.3,1070 1345,1070 1370,1095 1370,1160 1360,1170 1352.5,1170 23.4@1291.3,1170 ; 1352.5,1172.5 1511.4,1331.4 1511.4,1393.6 *.23@2201.4,2083.6
23+: 23.7 Connector6.3 | length 916.8
  Top Layer w7: Connector6.3 380,1300 505,1300 815,990 930,990 1010,1070 23.7@1078.7,1070
23-: 23.5 Connector6.6 | length 735.4
  Top Layer w7: Connector6.6 520,1340 595,1265 1010,1265 23.5@1105,1170
24: 24.2 24.4 *.24 | length 1584.1
  Top Layer w7: 24.4@1296.3,870 1315,870 1585.61,1140.61 1585.61,1439.53 *.24@2210.54,2064.46
24+: 24.7 Connector6.4 | length 1125.5
  Top Layer w7: Connector6.4 350,1240 425,1165 490,1165 700,955 700,770 795,675 880.66,675 975.66,770 24.7@1083.7,770
24-: 24.5 Connector6.5 | length 797
  Top Layer w7: Connector6.5 444.62,1240 469.62,1215 540,1215 815,940 935,940 1005,870 24.5@1083.7,870
330R: 330R.2 LED.1 | length 132.1
  Bottom Layer w7: LED.1@3922.5,2791.12 330R.2@4047.5,2791.12
  Bottom Layer w10: LED.1 LED.1@3922.5,2791.12 ; 330R.2@4047.5,2791.12 330R.2
+12: 1.1.1 1.2.1 1.5K.2 1.6 2.1.1 2.2.1 2.6 3.1.1 3.2.1 3.6 4.1.1 4.2.1 4.6 5.1.1 5.2.1 5.6 6.1.1 6.2.1 6.6 7.1.1 7.2.1 7.6 8.1.1 8.2.1 8.6 9.1.1 9.2.1 9.6 10.1.1 10.2.1 10.6 11.1.1 11.2.1 11.6 12.1.1 12.2.1 12.6 13.1.1 13.2.1 13.6 14.1.1 14.2.1 14.6 15.1.1 15.2.1 15.6 15V.2 16.1.1 16.2.1 16.6 17+.1 17-.1 17.6 18.1.1 18.2.1 18.6 19.1.1 19.2.1 19.6 20.1.1 20.2.1 20.6 21.1.1 21.2.1 21.6 22.1.1 22.2.1 22.6 23.1.1 23.2.1 23.6 24.1.1 24.2.1 24.6 | length 17681.6
  Top Layer w10: 12.2.1 884.06,1463.19 884.06,1415 ; 17+.1 885,817.5 ; 8.1.1 885,817.5 ; 10.1.1 884.06,1366.81 884.06,1415 ; 5.2.1 890,3072.5 ; 5.1.1 890,3072.5 ; 10.2.1 891.56,1070.69 891.56,1125 ; 7.2.1 891.56,1179.31 891.56,1125 ; 12.1.1 892.24,1735 ; 11.2.1 892.24,1735 ; 6.2.1 893.62,2402.5 ; 9.1.1 893.62,2402.5 ; 6.1.1 893.62,2700 ; 8.2.1 893.62,2700 ; 9.2.1 898.62,2067.5 ; 7.1.1 898.62,2067.5 ; v1@990,820 987.5,817.5 885,817.5 ; v1@990,2705 985,2700 893.62,2700 ; v1(990,2715) 18.6@1108.7,2715 ; v1(1000,815) 24.6@1093.7,815 ; 23.6@1078.7,1120 v1(990,1120) 985,1125 891.56,1125 ; 22.6@1083.7,1425 v1(990,1425) 894.06,1425 884.06,1415 ; 21.6@1083.7,1745 v1(990,1745) 902.24,1745 892.24,1735 ; 20.6@1108.7,2065 1106.2,2067.5 898.62,2067.5 ; 19.6@1108.7,2405 1106.2,2402.5 893.62,2402.5 ; 17.6@1108.7,3075 17.6 v1(990,3075) 987.5,3072.5 890,3072.5 ; 21.2.1@1632.5,3463.88 1687.5,3463.88 ; 8.6@1685,3280 v1(1685,3395) 1685,3461.38 1687.5,3463.88 ; 19.1.1@1742.5,3463.88 1687.5,3463.88 ; 11.1.1 1802.5,771.12 1862.5,771.12 ; 16.6@1860,928.7 v1(1860,840) 1860,773.62 1862.5,771.12 ; 24.1.1 1922.5,771.12 1862.5,771.12 ; 20.2.1 2010,3456.38 ; 7.6@2010,3280 v1(2010,3395) 2010,3456.38 ; 21.1.1 2010,3456.38 ; 4.1.1@2110,767.4 2155,767.4 ; 15.6@2155,921.1 v1(2155,832.4) 2155,767.4 ; 2.1.1@2235,767.4 2155,767.4 ; 20.1.1 2350,3446.38 ; 12.6@2345,3280 v1(2345,3385) 2345,3441.38 2350,3446.38 ; 22.2.1 2350,3446.38 ; 3.2.1@2405,788.62 2460,788.62 ; 13.6@2465,928.7 v1(2465,845) 2465,793.62 2460,788.62 ; 1.2.1@2535,788.62 2460,788.62 ; 22.1.1@2600,3449.38 2703,3449.38 23.1.1 ; 11.6@2660,3290 v1(2660,3400) 2660,3449.14 ; 3.1.1 2713.19,776.81 2765,776.81 ; 14.6@2765,928.7 v1(2765,840) 2765,776.81 ; 1.1.1 2816.81,776.81 2765,776.81 ; 24.2.1 2972.5,3453.88 3072.5,3453.88 15.1.1 ; 10.6@3025,3275 3025,3451.38 ; 15.2.1 3325,3446.38 ; 9.6@3325,3275 3325,3446.38 ; 23.2.1 3325,3446.38 ; 1.6@3406.3,1335 1.6 v1(3515,1335) 3591.38,1335 3596.38,1340 ; 2.6@3406.3,1600 3595.69,1600 ; 3.6@3406.3,1870 v1(3520,1870) 3588.19,1870 3593.19,1875 ; 4.6@3406.3,2120 4.6 3597.07,2120 ; 13.2.1 3645,3441.38 ; 16.1.1 3593.19,1928.19 3593.19,1875 ; 14.1.1 3595.69,1654.31 3595.69,1600 ; 16.2.1 3593.19,1821.81 3593.19,1875 ; 2.2.1 3596.38,1340 ; 4.2.1 3596.38,1340 ; 14.2.1 3595.69,1545.69 3595.69,1600 ; 18.2.1 3597.07,2055.69 3597.07,2120 ; 3597.76,2120 3597.07,2120 ; 17-.1 3597.07,2169.31 3597.07,2120 ; 5.6@3645,3275 v1(3645,3358.19) 3645,3441.38 ; 13.1.1 3645,3441.38 ; 18.1.1 3912.5,3438.88 4022.5,3438.88 19.2.1 ; 6.6@3965,3275 3965,3436.38
  Bottom Layer w10: 15V.2@280,3661.97 583.03,3661.97 637.44,3716.38 1.5K.2 771.81,3716.38 1093.19,3395 1115,3395 ; v1@982.5,1427.5 v1@982.5,1742.5 ; v1@982.5,1747.5 v1@982.5,2067.5 ; v1@982.8,822.8 v1@982.8,1117.2 ; v1@983.19,1123.19 v1@983.19,1421.81 ; v1@985,2070 v1@985,2705 ; v1@987.5,2707.5 987.5,3072.5 v1(990,3075) 985,3080 985,3265 1115,3395 ; v1@990,820 990,650 1080,560 1555,560 1615,620 1615,770 1685,840 v1(1860,840) 2155,840 2157.5,842.5 2462.5,842.5 v1(2465,845) 2467.5,842.5 2762.5,842.5 v1(2765,840) 3360,840 3515,995 v1(3515,1335) v1(3515,1590) 3517.5,1592.5 3517.5,1867.5 v1(3520,1870) 3517.5,1872.5 3517.5,2112.5 v1(3515,2115) ; v1(3970,3365) 3966.59,3361.59 3648.41,3361.59 v1(3645,3358.19) 3639.09,3364.09 3335.91,3364.09 v1(3330,3370) 3327.5,3372.5 3017.5,3372.5 v1(3015,3375) 3008.43,3375 2983.43,3400 v1(2660,3400) 2652.5,3392.5 2352.5,3392.5 v1(2345,3385) 2340,3390 2015,3390 v1(2010,3395) v1(1685,3395) 1115,3395
  other v1: 990,2070 990,2400
Exclock: ExClock.1 Switch.1 | length 2064.4
  Top Layer w7: v2(2795,2360) 3410,2360 3470,2300 4145,2300 ; 4155,2310 4155,2570 ExClock.1
  Top Layer w10: 4145,2300 4155,2310
  Bottom Layer w7: v2(2795,2360) Switch.1@2795,2466.85
  Bottom Layer w10: Switch.1@2795,2466.85 Switch.1
GND: 0.1uf.2 0.01uf.2 1.1.2 1.2.2 1.3 1uf.1 2.1.2 2.2.2 2.3 3.1.2 3.2.2 3.3 4.1.2 4.2.2 4.3 5.1.2 5.2.2 5.3 5V.1 6.1.2 6.2.2 6.3 7.1.2 7.2.2 7.3 8.1.2 8.2.2 8.3 9.1.2 9.2.2 9.3 10.1.2 10.2.2 10.3 10pf_1.2 10pf_2.2 11.1.2 11.2.2 11.3 12.1.2 12.2.2 12.3 13.1.2 13.2.2 13.3 14.1.2 14.2.2 14.3 15.1.2 15.2.2 15.3 15V.1 16.1.2 16.2.2 16.3 17+.2 17-.2 17.3 18.1.2 18.2.2 18.3 19.1.2 19.2.2 19.3 20.1.2 20.2.2 20.3 21.1.2 21.2.2 21.3 22.1.2 22.2.2 22.3 23.1.2 23.2.2 23.3 24.1.2 24.2.2 24.3 *.3 *.12 *.27 *.32 *.39 *.55 ExClock.2 JTAG.GND LED2.2 LED.2 Reset.2 TPS73633.2 UART.GND
Net1.5K_-: 1.5K.1 LED2.1 | length 182.1
  Bottom Layer w10: 1.5K.1 762.5,3761.12 937.5,3761.12 LED2.1
NR: 0.01uf.1@3780,2523.62 TPS73633.4 | length 149.7
  Bottom Layer w7: 0.01uf.1@3780,2523.62 3909.98,2523.62 TPS73633.4@3923.9,2537.55
OSC0: *.40 Switch.2 | length 738.4
  Top Layer w7: v2(2445,2135) 2460.97,2135 *.40
  Bottom Layer w7: v2(2445,2135) 2445,2170 2500,2225 2665,2225 2723.75,2283.75 2748.75,2283.75 2841.25,2376.25 2841.25,2401.25 Switch.2@2900,2460
OSC1: *.41 Switch.5 | length 514.8
  Top Layer w7: *.41@2543.92,2079.78 2575,2048.69 v2(2575,2000)
  Top Layer w10: *.41@2543.92,2079.78 *.41
  Bottom Layer w7: v2(2575,2000) 2640,2000 Switch.5@2892.5,2252.5
Reset: 10k.1 *.38 Reset.1 | length 743.8
  Top Layer w7: v2(2437.5,1832.5) 2550,1945 2550,1990.29 *.38
  Bottom Layer w7: v2(2437.5,1832.5) 2400,1795 Reset.1 2518.11,1535 2554.14,1535 2560,1540.86 10k.1
Rx: *.16 UART.Tx | length 487.7
  Top Layer w7: v2(1992.73,2368.92) 2033.93,2368.92 *.16@2128.33,2274.52
  Bottom Layer w10: UART.Tx 1992.73,2402.27 v2(1992.73,2368.92)
SWC: *.52 JTAG.SWC | length 1055.9
  Top Layer w7: *.52@2603.53,2318.26 2685.27,2400 v2(3060,2400)
  Bottom Layer w7: v2(3060,2400) 3295.57,2400 3405.57,2510 JTAG.SWC
SWD: *.51 JTAG.SWD | length 1139.8
  Top Layer w7: *.51@2617.45,2304.34 2693.61,2380.5 3085.5,2380.5 3220,2515 3220,2605 JTAG.SWD@3580,2605
Tx: *.15 UART.Rx | length 555.4
  Top Layer w7: v2(2040,2455) 2040,2390.69 *.15@2142.25,2288.44
  Bottom Layer w10: UART.Rx v2(2040,2455)
Xtal0: 10pf_2.1 ExClock.3 Switch.3 Xtal.1 | length 1628.1
  Top Layer w7: Xtal.1 v2(3445,2647.91) 3445,2740 3520,2815 3845,2815 4010,2980 ExClock.3
  Bottom Layer w7: Switch.3 3172.91,2647.91 Xtal.1
Xtal1: 10pf_1.1 Switch.4 Xtal.2 | length 515.4
  Bottom Layer w7: Switch.4 3000,2395 3060,2455 Xtal.2 3310,2525 3325,2525
pads on no net: 1.1 1.8 2.1 2.8 3.1 3.8 4.1 4.8 5.1 5.8 5V.3 6.1 6.8 7.1 7.8 8.1 8.8 9.1 9.8 10.1 10.8 11.1 11.8 12.1 12.8 13.1 13.8 14.1 14.8 15.1 15.8 15V.3 16.1 16.8 17.1 17.8 18.1 18.8 19.1 19.8 20.1 20.8 21.1 21.8 22.1 22.8 23.1 23.8 24.1 24.8 *.5 *.6 *.7 *.8 *.9 *.13 *.14 *.28 *.29 *.30 *.31 *.33 *.34 *.35 *.36 *.37 *.49 *.50 *.54 *.59 *.60 Switch.6
copper on no net: | length 7.1
  Bottom Layer w10: 1865,1733.62 1867.5,1736.12 ; 1987.5,1736.12 1990,1738.62

## Polygon pours and split planes (outlines as drawn)
GND on Top Layer "GND_L01_P024" (solid, remove dead copper, pour order 24): 115,4115 115,235 125,225 130,230 4425,230 4425,4115
no net on Top Layer "Top Layer-No Net" (solid, pour order 6): 2130,2040
no net on Top Layer "Top Layer-No Net 1" (solid, pour order 4): 3640,-92311.11
no net on Top Layer "Top Layer-No Net 2" (solid, pour order 2): 3845,-92356.11
GND on Bottom Layer "GND_L02_P022" (solid, remove dead copper, pour order 22): 120,4135 145,4110 4430,4110 4430,230 4425,225 140,225

## Silkscreen, mask and mechanical layers (free items; w line width, h text height)
Top Overlay:
  text "BLP Design" at 770,4215 h60
  text "July 2019 V1" at 770,4115 h60
  text "8" at 1945,3720.86 h80
  text "7" at 2055,3720 h80
  text "12" at 2140,3720 h80
  text "11" at 2245,3720 h80
  text "10" at 3175,3705 h80
  text "9" at 3300,3705 h80
  text "5" at 3410,3705 h80
  text "6" at 3520,3705 h80
  text "17" at 540.62,2705 h80
  text "18" at 540.47,2620 h80
  text "19" at 540.47,2515 h80
  text "20" at 535,2390 h80
  text "4" at 3785,1880 h80
  text "3" at 3795,1785 h80
  text "2" at 3795,1705 h80
  text "1" at 3805,1620 h80
  text "21" at 570,1520 h80
  text "22" at 570,1410 h80
  text "23" at 570,1305 h80
  text "24" at 575,1190 h80
  text "16" at 2165,515 h80
  text "15" at 2280,515 h80
  text "13" at 2390,515 h80
  text "14" at 2490,514.14 h80
Bottom Overlay:
  text "CLK" at 4435,3065 h80
  text "3.3V" at 3495,2695 h40
  text "Tx" at 1945,2670 h80
  text "ExClk" at 4465,2640 h80
  text "SWD" at 3500,2600 h40
  text "Rx" at 1945,2565 h80
  text "SWC" at 3505,2500 h40
  text "GND" at 2010,2475 h80
  text "GND" at 3505,2390 h40
Drill Drawing:
  lines w10: -5,4345 0,4340 0,0 4580,0 4580,4335 4570,4345 -5,4345